# Altium PCB PCB1.PcbDoc
Units mm, origin at the board's own origin, x right, y up, seen from the top; angles counter-clockwise.
Board outline 81.28 x 80.77 mm, 2 copper layers (Top Layer, Bottom Layer); 35 components, 27 nets, 138 pads, 2 vias.
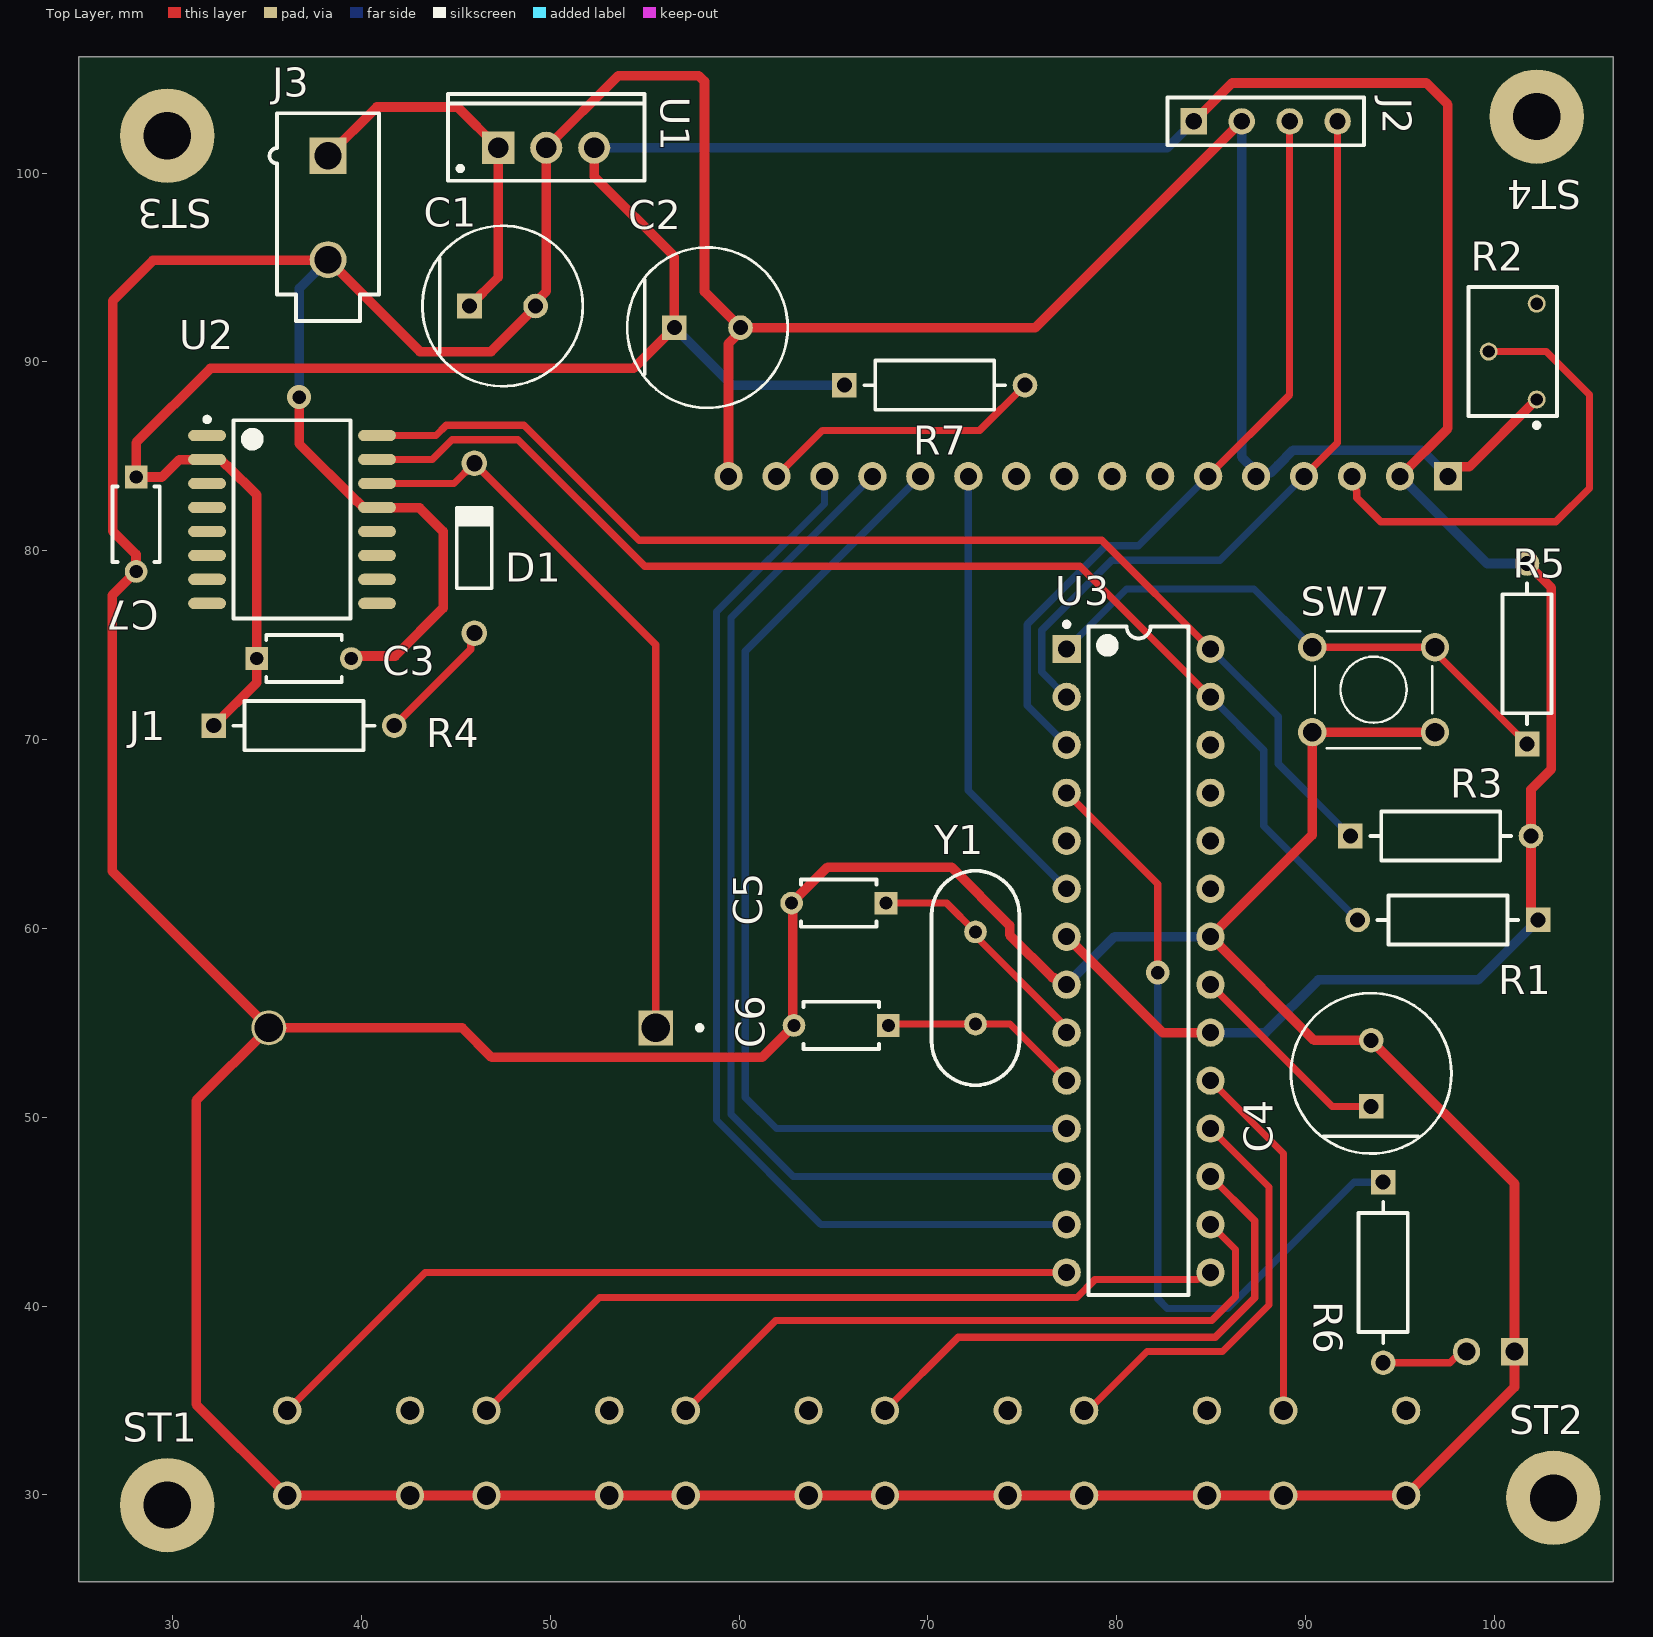
[diagram p0: Top Layer view]
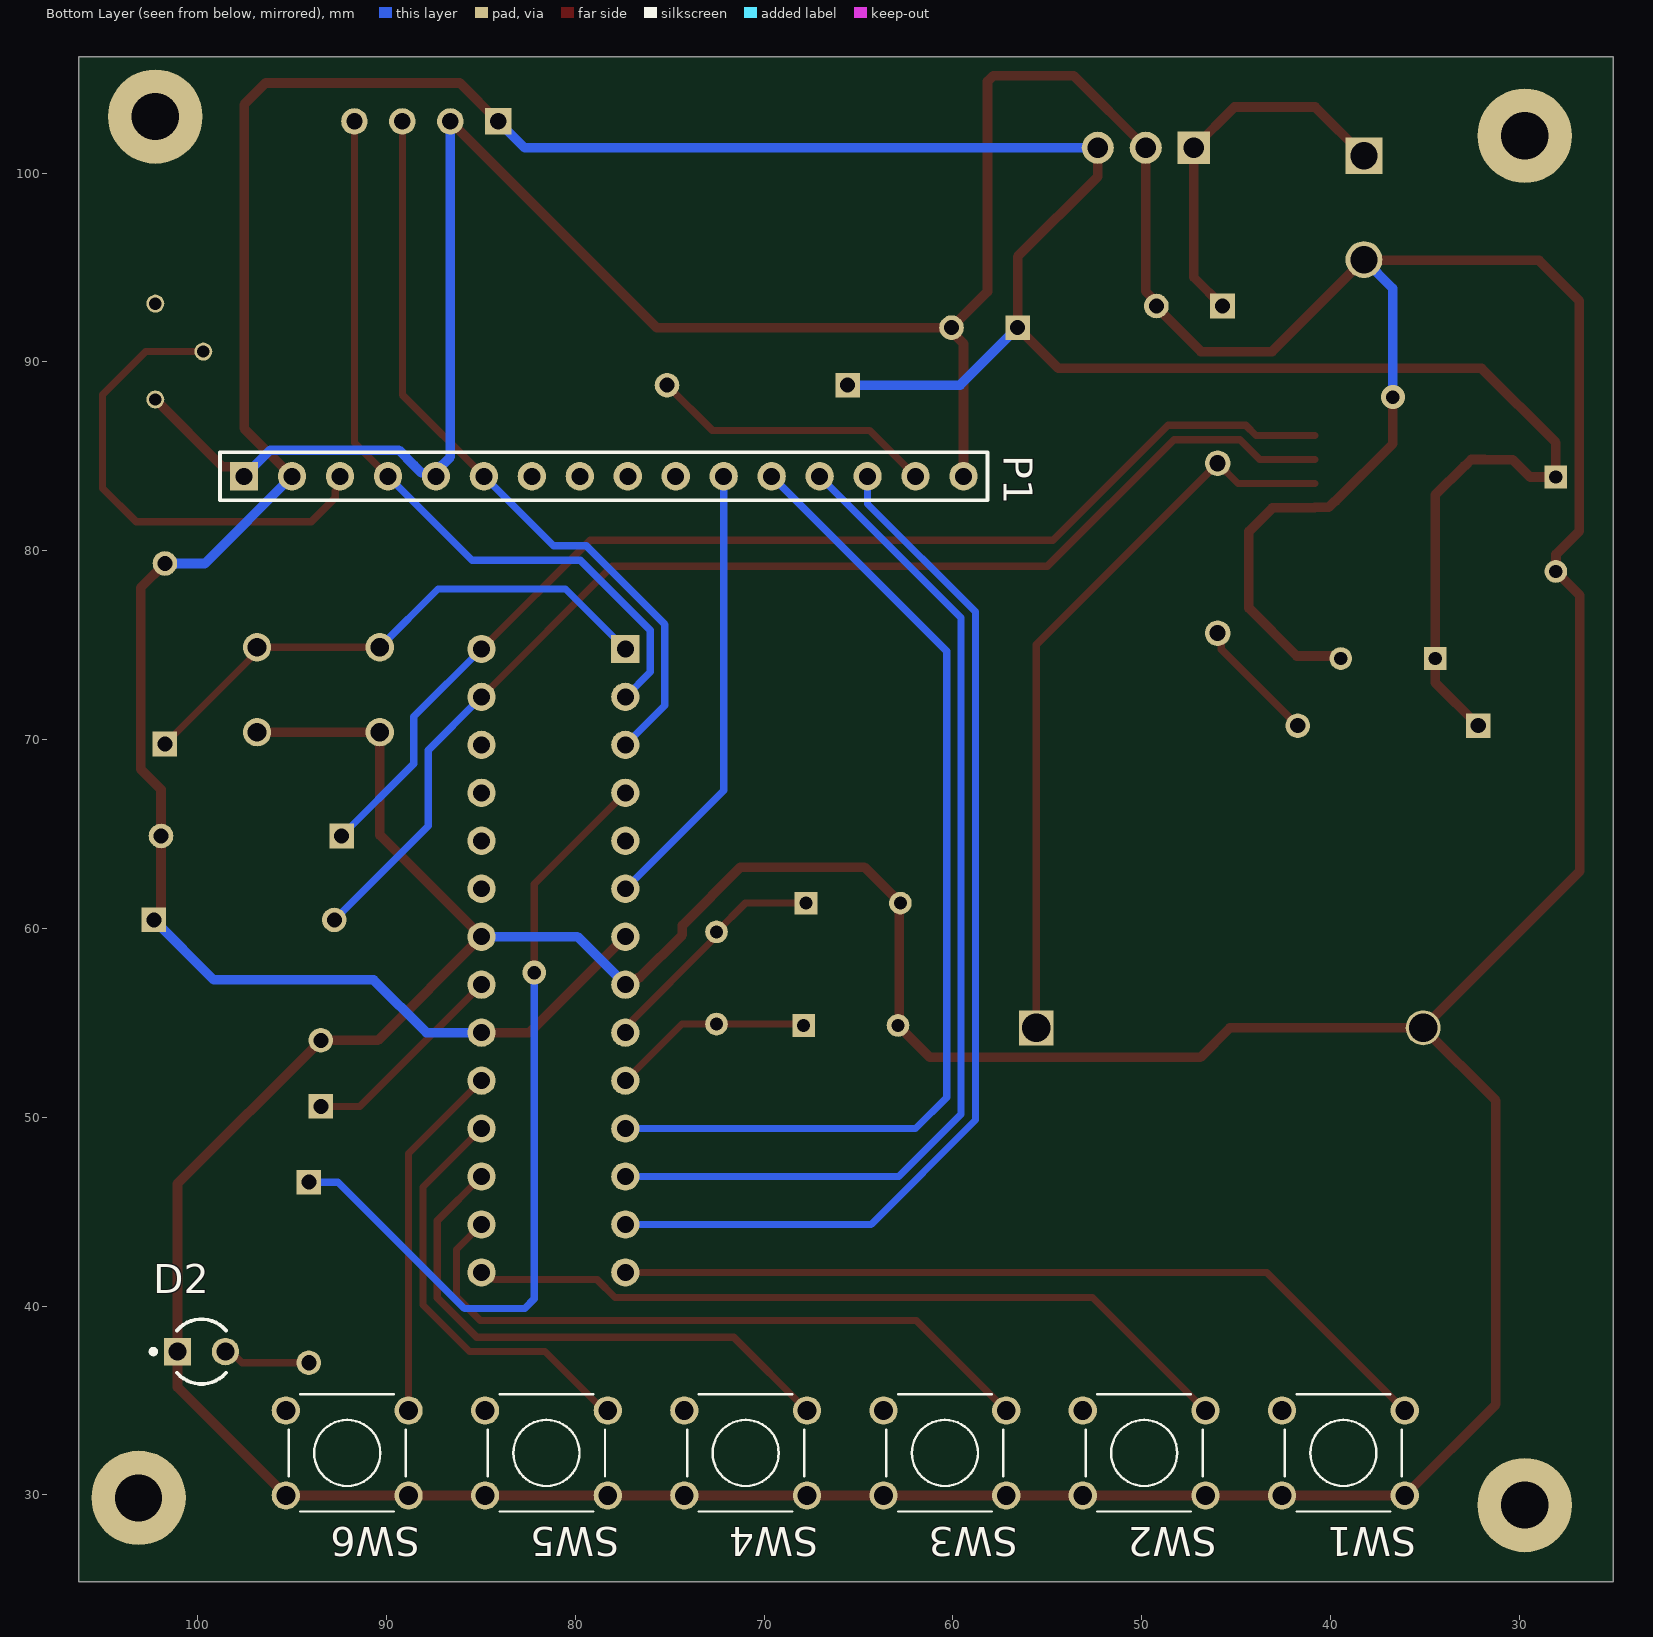
[diagram p1: Bottom Layer view, seen from below]
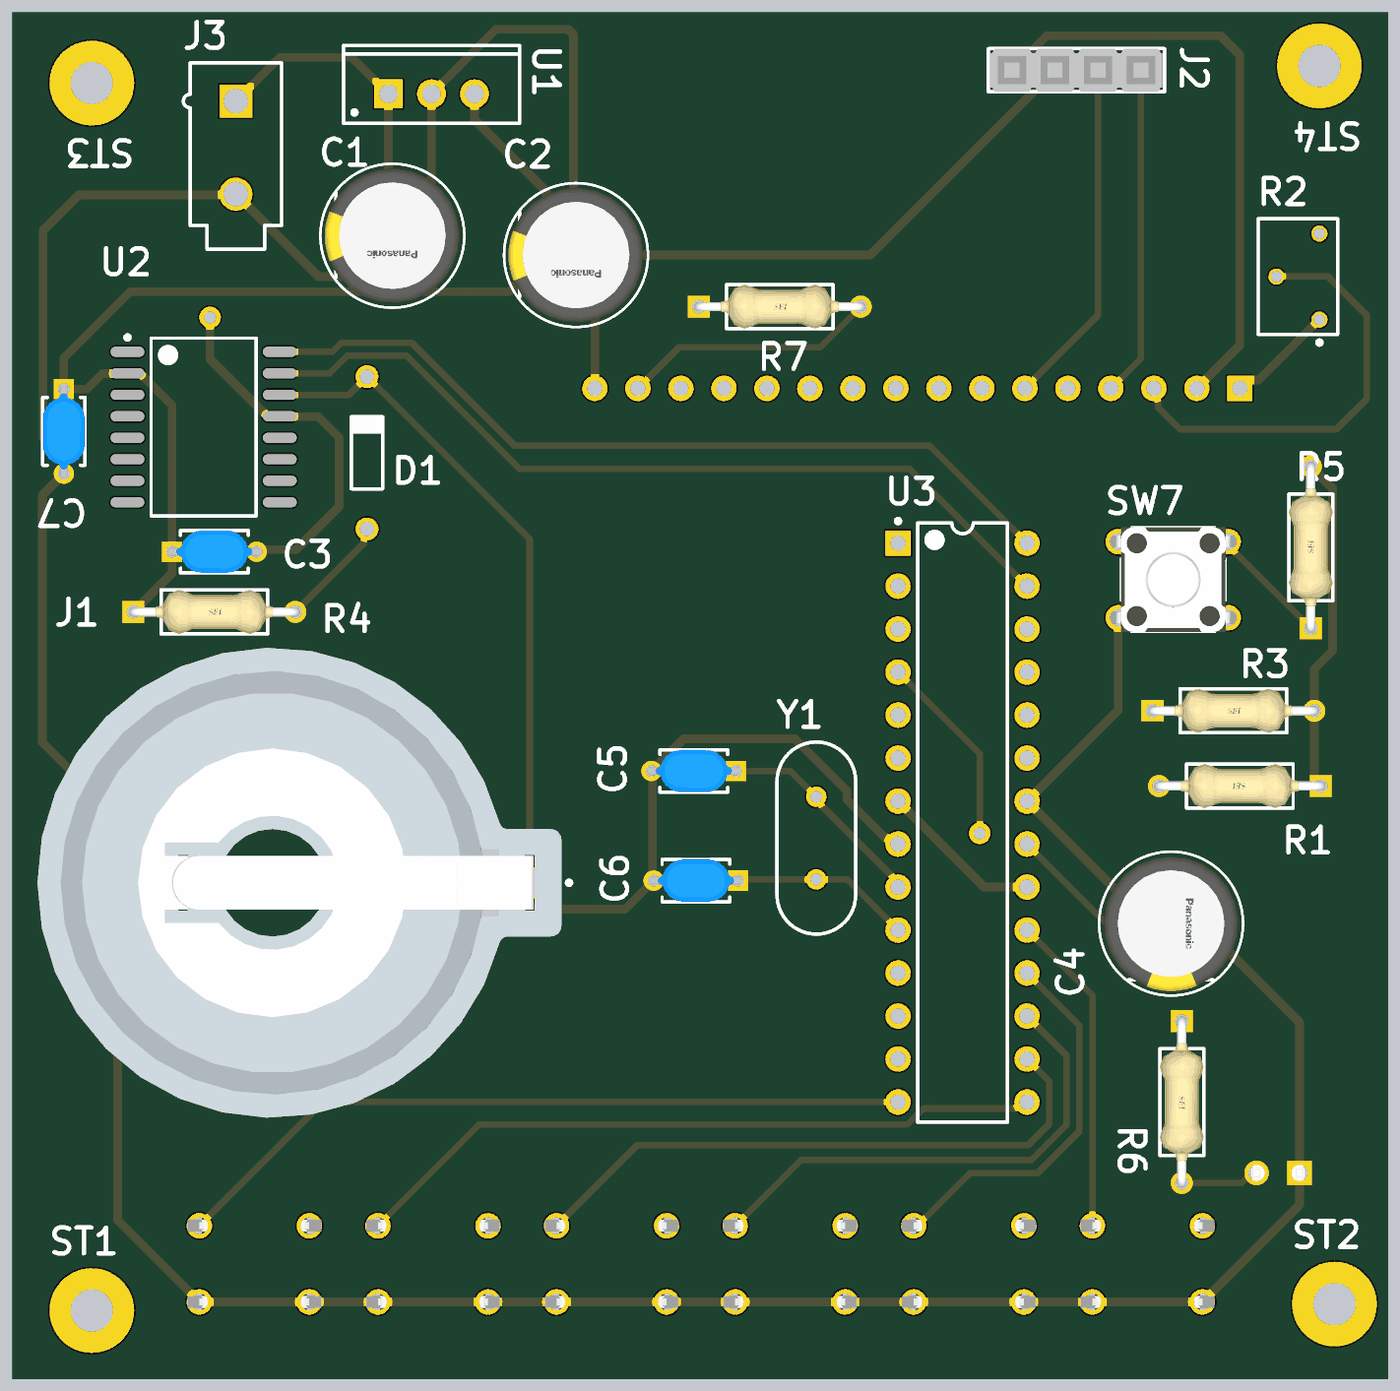
[diagram p2: 3D render of the assembled board from above, using the file's embedded part models]
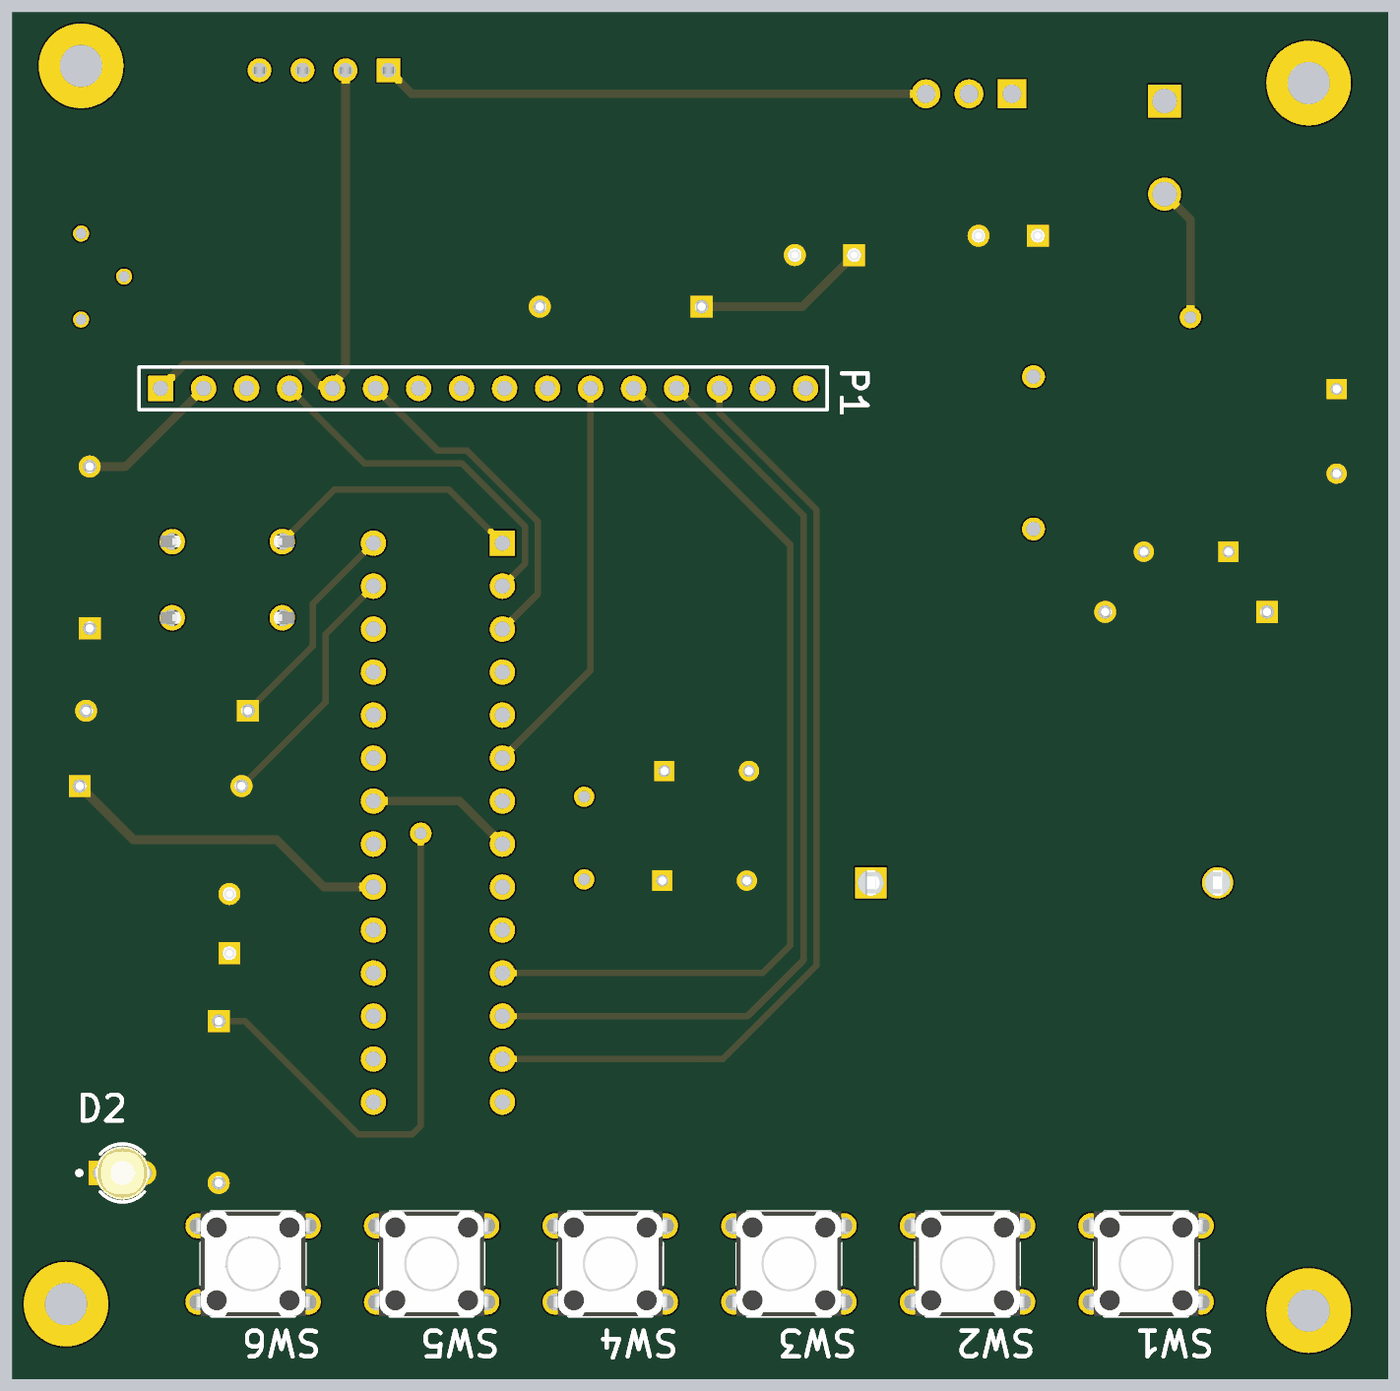
[diagram p3: 3D render of the assembled board from below, using the file's embedded part models]

## Layer stack, top to bottom
Top Solder: solder mask 0.0102, Solder Resist, Dk 3.5
Top Layer: signal copper 0.0356
Dielectric 1: dielectric 0.32, FR-4, Dk 4.8
Bottom Layer: signal copper 0.0356
Bottom Solder: solder mask 0.0102, Solder Resist, Dk 3.5

## Board outline
25.019,25.4 106.299,25.4 106.299,65.625 106.299,106.172 25.019,106.172

## Design rules (kind name [scope] priority, off if disabled: settings)
AssemblyTestPointUsage [All] p1: valid=2
Clearance [All] p1: gap=0.381 ignorepadtopadclearanceinfootprint=FALSE except(0.508: Arc-Hole Track-Hole SMDPad-Hole THPad-Hole Via-Hole Fill-Hole Poly-Hole Region-Hole Text-Hole)
FabricationTestPointUsage [All] p1: valid=2 allowmultiple=FALSE
PolygonConnect [All] p1: connectstyle=Relief reliefconductorwidth=0.254 reliefentries=4 polygonreliefangle="90 Angle" airgapwidth=0.254
RoutingVias [All] p1: holewidth=0.711 width=1.27 viastyle="Through Hole" minholewidth=0.711 minwidth=1.27 maxholewidth=0.711 maxwidth=1.27
SilkToSolderMaskClearance [IsPad] p1: minsilkscreentomaskgap=0.01 clearancetoexposedcopper=TRUE
SolderMaskExpansion [All] p1: expansion=0.102 istentingtop=FALSE
Width Width_1 [InNet('5V') or InNet('GND') or InNet('VCC')] p1: maxlimit=0.635 minlimit=0.381 preferedwidth=0.508
Width [All] p2: maxlimit=0.508 minlimit=0.254 preferedwidth=0.381
27 further rules are at their usual default settings.

## Components (designator, comment, footprint, x,y, rotation, side; value= is the part's Value field where it differs from the comment)
C1 "330nF" FP-EEU-FC1V221L-MFG 47.47,92.964 r0 top
C2 "100nF" FP-EEU-FC1V221L-MFG 58.321,91.821 r0 top
C3 "100nF" FP-RDE0M1-MFG 36.957,74.295 r0 top
C4 "100nF" FP-EEU-FC1V221L-MFG 93.472,52.324 r90 top
C5 "22pF" FP-RDE0M1-MFG 65.278,61.341 r180 top
C6 "22pF" FP-RDE0M1-MFG 65.405,54.864 r180 top
C7 "100nF" FP-RDE0M1-MFG 28.067,81.407 r270 top
D1 "1N4148" NXP-SOD27-2_V 45.974,80.137 r90 top
D2 "HLMP-1719" FP-HLMP-1719-MFG 99.791,37.592 r180 bottom
J1 "1025-7" KEYSTONE-1025-7-2_V 45.339,54.737 r90 top
J2 "SLW-104-01-T-S" SMTC-SLW-104-01-X-S 84.074,102.743 r0 top
J3 "39-28-1023" MOLX-39-28-1023-2_V 38.227,98.171 r0 top
P1 "Header 16" HDR1X16 97.536,83.947 r180 bottom
R1 "750" FP-CF14-MFG 97.536,60.452 r180 top
R2 "3266W-1-104LF" BOUR-3266W-3_V 100.965,90.551 r90 top
R3 "750" FP-CF14-MFG 97.155,64.897 r0 top
R4 "200" FP-CF14-MFG 36.957,70.739 r0 top
R5 "330" FP-CF14-MFG 101.727,74.549 r90 top
R6 "330" FP-CF14-MFG 94.107,41.783 r270 top
R7 "330" FP-CF14-MFG 70.358,88.773 r0 top
ST1 "PTH-M2D5X5" PTH-M2D5X5 29.718,29.464 r0 top
ST2 "PTH-M2D5X5" PTH-M2D5X5 103.124,29.845 r0 top
ST3 "PTH-M2D5X5" PTH-M2D5X5 29.718,101.981 r180 top
ST4 "PTH-M2D5X5" PTH-M2D5X5 102.235,102.997 r180 top
SW1 "430186070716" 430186070716 39.318,32.222 r0 bottom
SW2 "430186070716" 430186070716 49.869,32.222 r0 bottom
SW3 "430186070716" 430186070716 60.421,32.222 r0 bottom
SW4 "430186070716" 430186070716 70.972,32.222 r0 bottom
SW5 "430186070716" 430186070716 81.524,32.222 r0 bottom
SW6 "430186070716" 430186070716 92.075,32.222 r0 bottom
SW7 "430186070716" 430186070716 93.599,72.644 r0 top
U1 "L7805CV" TO220 49.784,101.346 r0 top
U2 "DS3231S" W16-H2_L 36.322,81.661 r0 top
U3 "ATmega328P-PU" 28P3 81.153,58.293 r0 top
Y1 "FOXSLF/120-20" FOX-FOXSLF-2_V 72.517,57.377 r90 top

## Footprints (in the part's own frame and the unit in brackets; to place one, negate y for a bottom-side part, rotate by r counter-clockwise, add the part's x,y. Pads: shape width x height; smd on the part's side, far side on the other; paste and mask are expansions set on the pad)
28P3 [mm] "28-Pin Plastic Dual In-Line Package (PDIP)"
  rect 1.5x1.5 hole 0.9: 1(-3.81,16.51)
  round 1.5 hole 0.9: 2(-3.81,13.97) 3(-3.81,11.43) 4(-3.81,8.89) 5(-3.81,6.35) 6(-3.81,3.81) 7(-3.81,1.27) 8(-3.81,-1.27) 9(-3.81,-3.81) 10(-3.81,-6.35) 11(-3.81,-8.89) 12(-3.81,-11.43) 13(-3.81,-13.97) 14(-3.81,-16.51) 15(3.81,-16.51) 16(3.81,-13.97) 17(3.81,-11.43) 18(3.81,-8.89) 19(3.81,-6.35) 20(3.81,-3.81) 21(3.81,-1.27) 22(3.81,1.27) 23(3.81,3.81) 24(3.81,6.35) 25(3.81,8.89) 26(3.81,11.43) 27(3.81,13.97) 28(3.81,16.51)
  silkscreen extent -3.93,-17.7 2.65,17.93, body extent -3.6,-17.65 3.6,17.65, height 4.58
430186070716 [mm] "6*6mm vertical type, THT, height 7.0mm, black actuator, 160gf, Bulk"
  round 1.5 hole 1: 1(-3.25,2.25) 2(-3.25,-2.25) 3(3.25,2.25) 4(3.25,-2.25)
  silkscreen extent -3.1,-3.1 3.1,3.1, body extent -3.95,-3.1 3.95,3.1, height 7.01
BOUR-3266W-3_V [mm] "THD, 3-Leads, Body 6.6x4.69mm, Pitch 2.54mm"
  round 0.95 hole 0.65: 1(-2.54,-1.27) 2(0,1.27) 3(2.54,-1.27)
  silkscreen extent -4.02,-2.34 3.41,2.34, body extent -3.3,-2.35 3.3,2.35, height 8.51
FOX-FOXSLF-2_V [mm] "THD, 2-Leads, Body 11.35x4.65mm, Pitch 4.88mm"
  round 1.2 hole 0.7: 1(-2.44,0) 2(2.44,0)
  silkscreen extent -5.68,-2.33 5.68,2.33, body extent -5.67,-2.32 5.68,2.32, height 3.6
FP-CF14-MFG [mm]
  rect 1.3x1.3 hole 0.8 paste-1000 mask+0: 1(-4.78,0)
  round 1.3 hole 0.8 paste-1000 mask+0: 2(4.78,0)
  silkscreen extent -3.73,-1.3 3.73,1.3, body extent -5.53,-1.4 5.53,1.4, height 0.25
FP-EEU-FC1V221L-MFG [mm]
  rect 1.3x1.3 hole 0.8 paste-1000 mask+0: 1(-1.75,0)
  round 1.3 hole 0.8 paste-1000 mask+0: 2(1.75,0)
  silkscreen extent -4.25,-4.25 4.25,4.25, body extent -4.35,-4.35 4.35,4.35, height 0.25
FP-HLMP-1719-MFG [mm]
  rect 1.45x1.45 hole 0.95 paste-1000 mask+0: 1(-1.27,0)
  round 1.45 hole 0.95 paste-1000 mask+0: 2(1.27,0)
  silkscreen extent -2.68,-1.71 1.3,1.71, body extent -1.59,-1.59 1.59,1.59, height 8.47
FP-RDE0M1-MFG [mm]
  rect 1.2x1.2 hole 0.7 paste-1000 mask+0: 1(-2.5,0)
  round 1.2 hole 0.7 paste-1000 mask+0: 2(2.5,0)
  silkscreen extent -2,-1.25 2,1.25, body extent -3.2,-1.35 3.2,1.35, height 0.25
HDR1X16 [mm] "Connector; Header; 16 Position"
  rect 1.5x1.5 hole 0.9: 1(0,0)
  round 1.5 hole 0.9: 2(2.54,0) 3(5.08,0) 4(7.62,0) 5(10.16,0) 6(12.7,0) 7(15.24,0) 8(17.78,0) 9(20.32,0) 10(22.86,0) 11(25.4,0) 12(27.94,0) 13(30.48,0) 14(33.02,0) 15(35.56,0) 16(38.1,0)
  silkscreen extent -1.27,-1.27 39.37,1.27
KEYSTONE-1025-7-2_V [mm] "SON, 10-Leads, Body 2.5 x 2.5 mm, Pitch 0.5 mm, Thermal Pad 2 x 1.2 mm"
  rect 1.85x1.85 hole 1.5: 1(0,-10.245)
  round 1.85 hole 1.5: 2(0,10.245)
  silkscreen extent -0.12,-12.69 0.13,-12.45, body extent -13.88,-12.13 13.88,18.84, height 12.58
MOLX-39-28-1023-2_V [mm] "THD, 2-Leads, Body 11x5.8mm"
  rect 1.95x1.95 hole 1.45: 1(0,2.75)
  round 1.95 hole 1.45: 2(0,-2.75)
  silkscreen extent -3.1,-6 2.7,5, body extent -3.1,-6 2.7,5, height 13.6
NXP-SOD27-2_V [mm] "SOD27, 2-Leads, Dia 1.85mm, Body Length 4.25mm, Pin Spacing 9mm"
  round 1.35 hole 0.85: 1(-4.5,0) 2(4.5,0)
  silkscreen extent -2.13,-0.93 2.13,0.93, body extent -4.78,-0.93 4.78,0.92, height 1.85
PTH-M2D5X5 [mm]
  round 5 hole 2.5: 1(0,0)
SMTC-SLW-104-01-X-S [mm] "Low Profile Socket Strip, 1x4 Pins, Vertical, 2.54mm Pitch, Female"
  rect 1.4x1.4 hole 0.86: 1(0,0)
  round 1.4 hole 0.86: 2(2.54,0) 3(5.08,0) 4(7.62,0)
  silkscreen extent -1.4,-1.27 9.02,1.27, body extent -1.27,-1.27 8.89,1.27, height 4.57
TO220 [mm] "TO, Thru-Hole, Vertical, Heatsink Mounted; 3 In-Line Leads; Pitch 2.54 mm"
  rect 1.7x1.7 hole 1.1: 1(-2.54,0)
  round 1.7 hole 1.1: 2(0,0) 3(2.54,0)
  silkscreen extent -5.2,-1.75 5.2,2.85, body extent -5.25,-1.8 5.25,2.9, height 19.7
W16-H2_L [mm] "SOIC, 16-Leads, Body 10.3x7.5mm, Pitch 1.27mm, IPC High Density"
  oval 2x0.6 smd: 1(-4.5,4.445) 2(-4.5,3.175) 3(-4.5,1.905) 4(-4.5,0.635) 5(-4.5,-0.635) 6(-4.5,-1.905) 7(-4.5,-3.175) 8(-4.5,-4.445) 9(4.5,-4.445) 10(4.5,-3.175) 11(4.5,-1.905) 12(4.5,-0.635) 13(4.5,0.635) 14(4.5,1.905) 15(4.5,3.175) 16(4.5,4.445)
  silkscreen extent -4.62,-5.25 3.1,5.42, body extent -3.8,-5.25 3.8,5.25, height 2.65

## Part data
C1 C4: library part CMP-05427-000010-1, "CAP ALUM 220UF 20% 35V RADIAL", Capacitance=220uF, Leakage Current=77uA, Manufacturer="Panasonic Electronic Components", Manufacturer Part Number=EEU-FC1V221L, Package=0, Ripple Current=730mA, Temperature="-55°C to +105°C", Temperature Range High=+105°C, Temperature Range Low=-55°C, Tolerance=20%, Voltage Rating=35V, Automotive=Yes, Automotive Grade="Grade 2", Category=Cap, ComponentLink2Description=Datasheet, ComponentLink2URL=https://industrial.panasonic.com/cdbs/www-data/pdf/RDF0000/ABA0000C1209.pdf, Device Class L1="Passive Components", Device Class L2=Capacitors, Device Class L3="Aluminum Electrolytic Capacitors", Digikey Description="CAP ALUM 220UF 20% 35V RADIAL", Dissipation Factor=12%, Esr=0.085Ω, Height=16.5mm, Lead Free=Yes, Life=2000Hours, Material=Aluminum, Mouser Description="Capacitor; Aluminum Electrolytic; Fc Radial Elec Cap 220uF 35V", Octopart=https://octopart.com/eeu-fc1v221l-panasonic-39478519, RoHS=TRUE
C2: library part CMP-05427-000010-1, "CAP ALUM 220UF 20% 35V RADIAL", Leakage Current=77uA, Manufacturer="Panasonic Electronic Components", Manufacturer Part Number=EEU-FC1V221L, Package=0, Ripple Current=730mA, Temperature="-55°C to +105°C", Temperature Range High=+105°C, Temperature Range Low=-55°C, Tolerance=20%, Voltage Rating=35V, Automotive=Yes, Automotive Grade="Grade 2", Capacitance=100nF, Category=Cap, ComponentLink2Description=Datasheet, ComponentLink2URL=https://industrial.panasonic.com/cdbs/www-data/pdf/RDF0000/ABA0000C1209.pdf, Device Class L1="Passive Components", Device Class L2=Capacitors, Device Class L3="Aluminum Electrolytic Capacitors", Digikey Description="CAP ALUM 220UF 20% 35V RADIAL", Dissipation Factor=12%, Esr=0.085Ω, Height=16.5mm, Lead Free=Yes, Life=2000Hours, Material=Aluminum, Mouser Description="Capacitor; Aluminum Electrolytic; Fc Radial Elec Cap 220uF 35V", Octopart=https://octopart.com/eeu-fc1v221l-panasonic-39478519, RoHS=TRUE
C3 C5 C6 C7: library part CMP-06035-051680-1, "Ceramic Capacitor 100nF ±10% 50V X7R Radial", Case/Package=Radial, Dielectric=X7R, Max Operating Temperature=125°C, Min Operating Temperature=-55°C, Package Quantity=2000, Resistor Type=Ceramic, Tolerance=10%, Voltage Rating=50V, Height=3.5mm, Height - Seated (Max)=0.236inch, Lead Diameter=0.5mm, Lead Free="Lead Free", Lead Pitch=0.197inch, Lead/Base Style=Kinked, Length=0.157inch, Mount="Through Hole", Packaging="Tape and Reel", Termination=Radial, Voltage Rating (DC)=50V, Width=3.5mm
  C3 C7: Capacitance=100nF
  C5 C6: Capacitance=22pF
D1: library part CMP-004-00000-1, "High Speed Diode, 100 V, 0.45 A, -65 to 175 degC, 2-Pin SOD27, RoHS, Bulk", Case/Package=DO, Forward Current=3dA, Forward Voltage=1V, Manufacturer=Fairchild, Max Operating Temperature=175°C, Max Surge Current=4A, Min Operating Temperature=-65°C, Package Quantity=2000, Package Reference=SOD27, Peak Reverse Current=5uA, Power=500mW, Datasheet URL=http://www.nxp.com/documents/data_sheet/1N4148_1N4448.pdf, Datasheet Version=Aug-04, Diameter=1.91mm, Elements=1, Manufacturer URL=https://www.fairchildsemi.com/, Package URL=http://www.nxp.com/documents/data_sheet/1N4148_1N4448.pdf, Packaging=Bulk, Pins=2, Recovery Time=4ns, RoHS Compliant=True
D2: library part CMP-2000-06410-2, "LED YELLOW DIFFUSED T-1 T/H", Colour=Yellow, Forward Current=2mA, Forward Voltage=1.8V, Manufacturer=Broadcom, Package=0, Power Dissipation=17.5mW, Reverse Voltage=5V, Temperature="-40°C to +100°C", Temperature Range High=+100°C, Temperature Range Low=-40°C, Automotive=No, Category=Diode, ComponentLink2Description=Datasheet, ComponentLink2URL=https://docs.broadcom.com/docs/AV02-1557EN, Device Class L1=Optoelectronics, Device Class L2=LEDs, Device Class L3=unset, Digikey Description="LED YELLOW DIFFUSED T-1 T/H", Lead Free=Yes, Led Orientation=Straight, Luminous Intensity=2.1mcd, Manufacturer Part Number=HLMP-1719, Mouser Description="Standard LEDs - Through Hole Yellow Diffused 585nm 2.1mcd", Octopart=https://octopart.com/hlmp-1719-broadcom-71130405, RoHS=TRUE, Viewing Angle=50°, Wavelength=585nm
J1: library part CMP-0465-00001-2, "Holder for 2477 or 2430 Cells P/N 1025-7, Body 27.762 x 30.963 mm, THM", Manufacturer=Keystone, Switch Current Limit (Typ) (A)=1, # of Cells=1, Cell Size="24 mm", ComponentLink1Description="Manufacturer URL", ComponentLink1URL=http://www.keyelco.com/, ComponentLink2Description=Datasheet, ComponentLink2URL=http://www.keyelco.com/product-pdf.cfm?p=3950, DatasheetVersion=Rev.C, Material=Plastic, Mounting Technology="Through Hole", PackageDescription="2-Pin Hand Drawn, Body 27.762 x 30.963 mm", PackageReference=KEYSTONE-1025-7-2, PartNumber=1025-7, Type=HOLDER
J2: library part CMP-1023-00131-1, "Low Profile Socket Strips, Through-hole, Vertical, -55 to 105 degC, 2.54 mm Pitch, 4-Pin, Female, RoHS", Manufacturer=Samtec, Temperature Range="-55 to 105 degC", ComponentLink1Description="Manufacturer URL", ComponentLink1URL=http://www.samtec.com, ComponentLink2Description=Datasheet, ComponentLink2URL=http://www.samtec.com/documents/webfiles/pdf/SLW.PDF, ComponentLink3Description="Package Specification", ComponentLink3URL=http://www.samtec.com/documents/webfiles/cpdf/SLW-1XX-01-X-X-MKT.pdf, DatasheetVersion=F-214, Mounting Technology=Through-hole, Orientation=Vertical, PackageDescription="Low Profile Socket Strip", PackageReference=SLW-104-01-X-S, PackageVersion="X, 9/1987", PartNumber=SLW-104-01-T-S, Pitch="2.54 mm", RoHS=True
J3: library part CMP-2000-05244-1, "Female Header, Pitch 4.2 mm, 1 x 2 Position, Height 12.8 mm, Tail Length 3.5 mm, -40 to 105 degC, RoHS", Colour=Clear, Current Rating=13A, Flammability Rating=UL94V-2, Manufacturer=Molex, Voltage Rating V AC=600V, Working Voltage=250V, Connector Body Material=–, Connector Insert Type=Header, Connector Mounting=PCB, Connector Mounting Orientation=PCB, Connector Type=RectangularPower, Contact Gender=–, Contact Material=Brass, Contact Plating=Tin, Contact Termination=Solder, Datasheet URL=https://datasheet.ciiva.com/11746/0900766b80460d9e-11746456.pdf, Datasheet Version="Rev. F, 05/2004", Gender=Header, Lead Spacing=4.2mm, Manufacturer URL=http://www.molex.com/, Mounting Orientation=Straight, Mounting Type=PCBoard, MSL=–, No. of Contacts=4, No. of Poles=2, No. of Rows=1, No. of Ways=2, Pitch Spacing=4.2mm, Series=Mini-FitJr, SVHC=–, Termination Method=Solder
P1: "Header, 16-Pin", LatestRevisionDate=17-Jul-2002, LatestRevisionNote="Re-released for DXP Platform.", Publisher="Altium Limited"
R1 R3 R4 R5 R6 R7: library part CMP-26528-000003-1, "RES 7.5K OHM 1/4W 5% AXIAL", Case/Package=Axial, Max Operating Temperature=155°C, Max Power Dissipation=250mW, Min Operating Temperature=-55°C, Resistor Type="Carbon Film", Temperature Coefficient=-400ppm/°C, Tolerance=5%, Contact Plating=Tin, Diameter=2.3mm, Features="Flame Retardant Coating", Lead Free="Lead Free", Length=0.256inch, Mount="Through Hole", Number of Terminations=2, Packaging="Tape and Reel", Power Rating=250mW, Radiation Hardening=No, RoHS Compliant=Yes, Series=CF
  R1 R3: Resistance=750
  R4: Resistance=200
  R5 R6 R7: Resistance=330
R2: library part CMP-0975-00021-1, "Square Trimpot Trimming Potentiometer, 100 KOhm, 0.25 W, -55 to 125 degC, 3-Pin THD, RoHS, Tube", Manufacturer=Bourns, Operating Temperature="-55 to 125 degC", Power Rating@70 degC="0.25 W", Resistance="100 kOhm", Tolerance=+/-10%, ComponentLink1Description="Manufacturer URL", ComponentLink1URL=https://www.bourns.com/, ComponentLink2Description=Datasheet, ComponentLink2URL=https://www.bourns.com/data/global/pdfs/3266.pdf, ComponentLink3Description="Package Specification", ComponentLink3URL=https://www.bourns.com/data/global/pdfs/3266.pdf, DatasheetVersion=Apr-14, Mounting Technology="Through Hole", PackageDescription="3-Pin THD, Body 6.35 x 4.31 mm, Pitch 2.54 mm", Packing=Tube, PartNumber=3266W-1-104LF, RoHS=TRUE
ST1 ST2 ST3 ST4: library part CMP-00028-00004-1, "M2 PTH (2.5mm), 5mm pad", Pins=1
SW1 SW2 SW3 SW4 SW5 SW6 SW7: library part CMP-1453-00013-1, "WS-TATV THT Tact Switch 6X6 mm", Manufacturer="Wuerth Elektronik", ComponentLink1Description="Manufacturer URL", ComponentLink1URL=http://www.we-online.com, ComponentLink2Description=Datasheet, ComponentLink2URL=http://katalog.we-online.de/em/datasheet/4301x6.pdf, NoPins=04, PackageReference=430186070716, PartNumber=430186070716
U1: library part CMP-019-00018-2, "Positive Voltage Regulator IC, 1.5 A, 5 V, 0 to 125 degC, 3-Pin TO-220, RoHS, Tube", Case/Package=TO-220, Dropout Voltage=2V, Manufacturer=STMicroelectronics, Max Input Voltage=35V, Max Operating Temperature=125°C, Max Ouput Current=1.5A, Max Supply Voltage=20V, Min Input Voltage=7V, Min Operating Temperature=0°C, Min Supply Voltage=8V, Nominal Output Voltage=5V, Package Quantity=50, Datasheet URL=https://datasheet.ciiva.com/15111/getdatasheetpartid-44136-15111027.pdf, Datasheet Version="Rev 30, 09/2012", Manufacturer URL=http://www.st.com/, Mounting Technology=TH, Output Current=1.5A, Output Voltage=5V, Outputs=1, Packaging=Rail/Tube, Pins=3, RoHS Compliant=True
U2: library part CMP-0254-00244-1, "Extremely Accurate I2C-Integrated Real-Time Clock/TCXO/Crystal, 16-Pin SO, 0 to 70 degC", Code_IPC=SOIC127P1030-16, Code_JEDEC=MS-013-AA, ComponentLink1Description="Manufacturer URL", ComponentLink1URL=http://www.maxim-ic.com, ComponentLink2Description=Datasheet, ComponentLink2URL=http://datasheets.maxim-ic.com/en/ds/DS3231.pdf, ComponentLink3Description="Package Specification", ComponentLink3URL=http://pdfserv.maxim-ic.com/package_dwgs/21-0042.PDF, DatasheetVersion="Rev 8, Jul-2010", PackageDescription="16-Pin Small-Outline IC, Wide (0.3in), 1.27 mm Pitch, SOIC (W)", PackageReference=W16-H2, PackageVersion="revD, 2010"
U3: library part CMP-0095-00013-2, "8-bit AVR Microcontroller, 32KB Flash, 1KB EEPROM, 2KB SRAM, 28-pin PDIP, Industrial Grade (-40°C to 85°C)", ComponentLink1Description="Manufacturer URL", ComponentLink1URL=http://www.atmel.com/, ComponentLink2Description="ATmega48A/48PA/88A/88PA/168A/168PA/328/328P Datasheet", ComponentLink2URL=http://www.atmel.com/dyn/resources/prod_documents/8271.pdf, ComponentLink3Description="ATmega48A/48PA/88A/88PA/168A/168PA/328/328P Summary", ComponentLink3URL=http://www.atmel.com/dyn/resources/prod_documents/8271S.pdf, DatasheetVersion="revD, May-2011", PackageDescription="28-lead (0.300\"/7.62mm Wide) Plastic Dual Inline Package (PDIP)", PackageReference=28P3, PackageVersion="revB, Sep-2001", RevisionNote="DatasheetVersion updated. URLs added."
Y1: library part CMP-1749-00004-1, "Resistance Weld Thru-Hole Crystal, 12 MHz, +/-30 ppm, -20 to 70 degC, 2-Pin THD, RoHS, Bulk", Case\Package=TO-251-3, Input Capacitance="350 pF", Max Operating Temperature="150 degC", Max Power Dissipation="2.5 W", Min Operating Temperature="-55 degC", Package Quantity=70, ComponentLink1Description="Manufacturer URL", ComponentLink1URL=http://www.foxonline.com/, ComponentLink2Description=Datasheet, ComponentLink2URL=http://www.foxonline.com/pdfs/hc49slf.pdf, DatasheetVersion=Mar-15, Elements=1, Height="6.1 mm", Length="6.6 mm", Mount="Through Hole", PackageDescription="2-Pin Through Hole Device, Body 11.35 x 4.65 mm, Pitch 4.88 mm", PackageReference=FOXSLF-2, Packaging=Rail/Tube, Pins=3, Radiation Hardening=No, Rds On Max="115 mohm", REACH SVHC="No SVHC", RoHSCompliant=true, Typical Rise Time="90 ns", Width="2.3 mm"

## Via types
v1: diameter 1.27, hole 0.711, Top Layer to Bottom Layer, 2 vias

## Nets (pads, with @x,y where several pads share a name; then routed paths per layer and width w, separated by ;. In a path a pad name is that pad's centre, name@x,y a point inside that pad or via, vN(x,y) a via of type N, cw(c..) or ccw(c..) an arc to the next point about the centre after c; other vN are vias at no path point)
5V: C2.1 C3.1 C7.1 J2.1 P1.2 R1.1 R3.2 R4.1 R5.2 R7.1 U1.3 U2.2 U3.7 U3.20 | length 201.2
  Top Layer w0.508: R4.1 34.457,73.019 C3.1 34.457,82.953 32.909,84.501 32.882,84.501 32.547,84.836 U2.2 31.804,84.818 30.34,84.818 29.429,83.907 C7.1 28.067,85.725 32.004,89.662 54.412,89.662 C2.1 56.571,95.575 52.324,99.822 U1.3 ; U3.7 82.423,54.483 U3.20 ; J2.1 86.106,104.775 96.393,104.775 97.536,103.632 97.536,86.487 P1.2 ; R5.2 103.012,78.044 103.012,68.435 101.935,67.358 R3.2 101.935,60.833 R1.1
  Bottom Layer w0.508: U1.3 82.677,101.346 J2.1 ; C2.1 59.619,88.773 R7.1 ; U3.20 87.884,54.483 90.678,57.277 99.141,57.277 R1.1 ; P1.2 99.614,79.329 R5.2
ALARM: SW5.2 U3.18 | length 22.7
  Top Layer w0.381: SW5.2 78.475,34.472 81.595,37.592 85.598,37.592 88.063,40.057 88.063,46.303 U3.18
BACK: SW6.2 U3.19 | length 19.1
  Top Layer w0.381: U3.19 88.825,48.081 88.825,37.775 SW6.2
D0: J2.4 P1.4 U3.2 | length 41.5
  Top Layer w0.381: U3.2 U3.2@77.557,72.477 ; P1.4 91.694,85.725 J2.4
  Bottom Layer w0.381: U3.2@77.557,72.477 U3.2 76.021,73.585 76.021,75.79 79.734,79.502 85.471,79.502 P1.4
D1: J2.3 P1.6 U3.3 | length 40.7
  Top Layer w0.381: P1.6 89.154,88.265 J2.3
  Bottom Layer w0.381: U3.3 75.259,71.807 75.259,76.105 79.418,80.264 81.153,80.264 P1.6
D4: P1.11 U3.6 | length 24
  Bottom Layer w0.381: P1.11 72.136,67.31 U3.6
D5: P1.12 U3.11 | length 54.4
  Bottom Layer w0.381: P1.12 60.325,74.676 60.325,51.054 61.976,49.403 U3.11
D6: P1.13 U3.12 | length 56
  Bottom Layer w0.381: P1.13 59.563,76.454 59.563,50.165 62.865,46.863 U3.12
D7: P1.14 U3.13 | length 57.3
  Bottom Layer w0.381: P1.14 64.516,82.485 58.801,76.77 58.801,49.849 64.327,44.323 U3.13
DEC: SW3.2 U3.16 | length 36
  Top Layer w0.381: SW3.2 61.942,39.243 85.028,39.243 86.285,40.499 86.285,43.001 U3.16
GND: C1.2 C2.2 C3.2 C4.2 C5.2 C6.2 C7.2 D2.1 J1.2 J2.2 J3.2 P1.1 P1.5 P1.16 R2.1 SW1.1 SW1.3 SW2.1 SW2.3 SW3.1 SW3.3 SW4.1 SW4.3 SW5.1 SW5.3 SW6.1 SW6.3 SW7.2 SW7.4 U1.2 U2.13 U3.8 U3.22 | length 417.8
  Top Layer w0.508: v1(36.703,88.138) 36.703,85.663 39.735,82.631 39.762,82.631 40.097,82.296 U2.13 40.84,82.278 43.071,82.278 44.323,81.026 44.323,76.962 41.788,74.427 39.589,74.427 C3.2 ; P1.16 59.436,90.972 60.071,91.607 C2.2 ; U3.8 77.075,57.023 76.704,57.394 76.591,57.394 74.327,59.658 74.327,60.166 71.247,63.246 64.683,63.246 C5.2 62.841,61.277 62.841,54.927 C6.2 61.218,53.177 46.895,53.177 45.335,54.737 J1.2 ; J2.2 75.692,91.821 C2.2 ; SW7.4 SW7.2 90.349,64.949 U3.22 90.452,54.074 C4.2 101.061,46.485 D2.1 101.061,35.708 SW6.3 SW6.1 SW5.3 SW5.1 SW4.3 SW4.1 SW3.3 SW3.1 SW2.3 SW2.1 SW1.3 SW1.1 31.242,34.798 31.242,50.885 J1.2 ; P1.1 98.032,84.443 98.667,84.443 R2.1 R2.1@102.15,88.096 ; J1.2 26.797,63.034 26.797,77.637 C7.2 28.058,78.916 28.058,79.808 26.832,81.033 26.832,93.253 28.956,95.377 38.183,95.377 J3.2 43.097,90.551 46.863,90.551 49.22,92.908 C1.2 49.22,93.178 49.784,93.742 U1.2 53.594,105.156 57.868,105.156 58.166,104.858 58.166,93.726 C2.2
  Bottom Layer w0.508: v1(36.703,88.138) 36.703,93.897 J3.2 ; U3.8 79.883,59.563 U3.22 ; J2.2 86.614,84.977 87.376,84.215 P1.5 ; P1.5@87.566,84.137 88.158,84.137 88.531,84.509 88.531,84.521 89.342,85.332 96.151,85.332 P1.1
INC: SW2.2 U3.15 | length 41.4
  Top Layer w0.381: SW2.2 52.609,40.461 76.796,40.461 77.89,40.461 78.831,41.402 84.279,41.402 84.66,41.783 U3.15
LED: R6.1 U3.4 | length 43.7
  Top Layer w0.381: U3.4 82.169,62.357 v1(82.169,57.658)
  Bottom Layer w0.381: v1(82.169,57.658) 82.169,40.386 82.677,39.878 85.87,39.878 92.555,46.563 R6.1
MODE: SW1.2 U3.14 | length 44.3
  Top Layer w0.381: SW1.2 43.379,41.783 48.01,41.783 U3.14
NetC4_1: C4.1 U3.21 | length 11.2
  Top Layer w0.381: U3.21 91.412,50.574 C4.1
NetC5_1: C5.1 U3.9 Y1.2 | length 12.7
  Top Layer w0.381: C5.1 70.993,61.341 Y1.2 72.517,59.595 77.343,54.769 U3.9
NetC6_1: C6.1 U3.10 Y1.1 | length 10.7
  Top Layer w0.381: C6.1 67.978,54.937 Y1.1 74.349,54.937 U3.10
NetD1_1: D1.1 R4.2 | length 6.7
  Top Layer w0.381: R4.2 45.789,74.791 45.789,75.452 D1.1
NetD1_2: D1.2 J1.1 U2.14 | length 39.5
  Top Layer w0.381: U2.14 44.903,83.566 D1.2 55.584,75.027 J1.1
NetD2_2: D2.2 R6.2 | length 4.8
  Top Layer w0.381: R6.2 97.643,37.003 98.232,37.592 D2.2 D2.2@98.424,37.689
NetP1_3: P1.3 R2.2 | length 26.1
  Top Layer w0.381: P1.3 92.67,83.733 92.67,83.204 92.71,83.164 92.71,82.804 93.98,81.534 103.251,81.534 105.029,83.312 105.029,88.265 102.743,90.551 R2.2
NetP1_15: P1.15 R7.2 | length 15.2
  Top Layer w0.381: P1.15 64.408,86.379 72.744,86.379 R7.2
NetR5_1: R5.1 SW7.1 SW7.3 U3.1 | length 29.2
  Top Layer w0.381: SW7.1 SW7.3 96.849,74.647 R5.1
  Bottom Layer w0.381: U3.1 80.518,77.978 87.265,77.978 SW7.1
SCL: R3.1 U2.16 U3.28 | length 62.3
  Top Layer w0.381: U2.16 43.945,86.106 44.484,86.646 48.609,86.646 54.693,80.562 79.204,80.562 U3.28
  Bottom Layer w0.381: U3.28@84.963,74.772 U3.28 88.546,71.22 88.546,68.726 R3.1
SDA: R1.2 U2.15 U3.27 | length 65.5
  Top Layer w0.381: U2.15 43.752,84.836 44.8,85.884 48.294,85.884 54.997,79.18 78.046,79.18 U3.27
  Bottom Layer w0.381: U3.27@85.217,72.263 U3.27 85.09,72.136 87.784,69.442 87.784,65.424 R1.2
SET: SW4.2 U3.17 | length 29.4
  Top Layer w0.381: SW4.2 71.604,38.354 85.217,38.354 87.301,40.438 87.301,44.525 U3.17
VCC: C1.1 J3.1 U1.1 | length 20
  Top Layer w0.508: J3.1 40.811,103.505 45.085,103.505 U1.1 47.244,94.488 C1.1
pads on no net: P1.7 P1.8 P1.9 P1.10 R2.3 ST1.1 ST2.1 ST3.1 ST4.1 SW1.4 SW2.4 SW3.4 SW4.4 SW5.4 SW6.4 U2.1 U2.3 U2.4 U2.5 U2.6 U2.7 U2.8 U2.9 U2.10 U2.11 U2.12 U3.5 U3.23 U3.24 U3.25 U3.26

## Silkscreen, mask and mechanical layers (free items; w line width, h text height)
Mechanical 15:
  lines w0.125: 25.4,25.4 25.4,109.728 111.379,109.728 112.014,109.093 112.014,25.4